# EAGLE board 555-Oscillator (EAGLE 7.2.0)
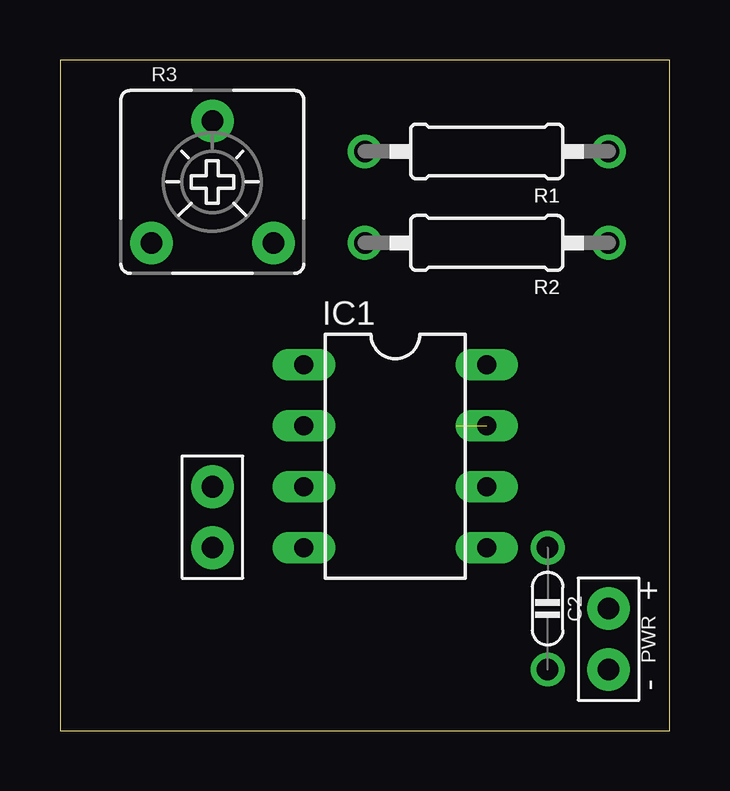
[diagram p0: board, top side]
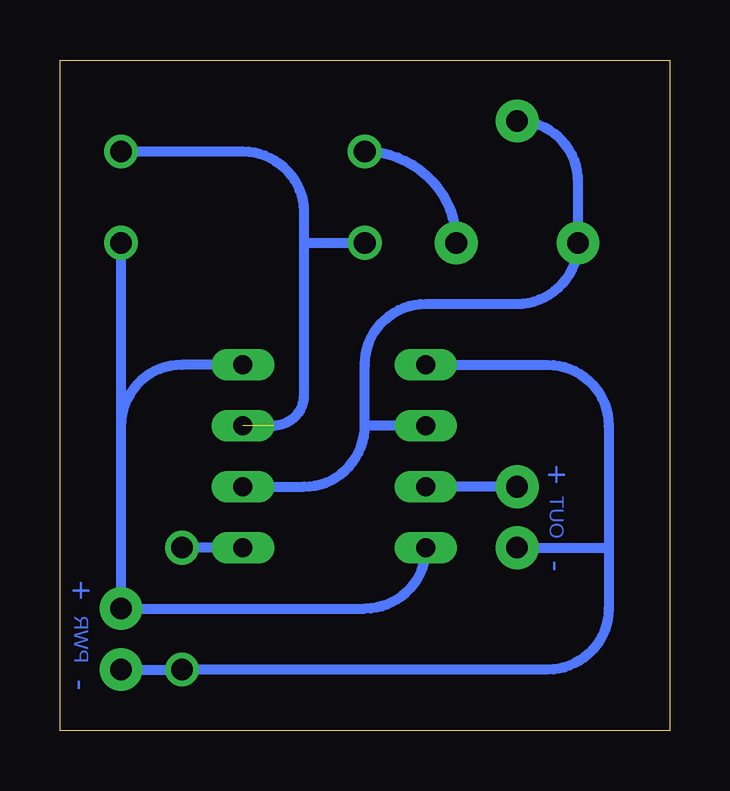
[diagram p1: board, bottom side, seen from below]

Size 25.4 x 27.94 mm. Coordinates in mm from the lower left corner, seen from the top.
Outline: 0,0 25.4,0 25.4,27.94 0,27.94 0,0
Copper layers (1*16): Top 0.035mm / dielectric 1.5mm / Bottom 0.035mm
Design rules "default": minimum track width 10mil, minimum drill 24mil, track to track 8mil, track to pad 8mil, pad to pad 8mil, via to via 8mil, smd to smd 8mil, copper to edge 40mil, drill to drill 8mil, minimum pad ring 10mil, minimum via ring 8mil, stop-mask expansion 4mil, vias tented up to drill 0mil, thermal gap 10mil

## Footprints (pad centres in the part's own frame; a part is rotated, then mirrored left to right if it is on the bottom)
C050-020X036/V = drill 0.9: 1 0,-2.54; 2 0,2.54
DIL08 = drill 0.8 pad 1.27 long: 1 -3.81,3.81; 2 -3.81,1.27; 3 -3.81,-1.27; 4 -3.81,-3.81; 5 3.81,-3.81; 6 3.81,-1.27; 7 3.81,1.27; 8 3.81,3.81
SPAD-+ = drill 0.9 pad 1.778: 1 0,1.27; 2 0,-1.27
0207/10 = drill 0.9: 1 -5.08,0; 2 5.08,0
POT-V = drill 0.9 pad 1.778: A -2.54,-2.54; E 2.54,-2.54; S 0,2.54
PWR-R = drill 0.9 pad 1.778: 1 0,-1.27; 2 0,1.27

## Placement (x,y rotation side)
C2  10n  [C050-020X036/V]  20.32,5.08 180 top
IC1  555  [DIL08]  13.97,11.43 0 top
OUT  SPAD+--+  [SPAD-+]  6.35,8.89 180 top
R1  1kΩ  [0207/10]  17.78,24.13 180 top
R2  10kΩ  [0207/10]  17.78,20.32 180 top
R3  220kΩ  [POT-V]  6.35,22.86 0 top
S1  VCC_GNDPWR-R  [PWR-R]  22.86,3.81 0 top

## Library data of the parts
C2 = c
IC1 = ic
OUT S1 = pad
R1-R3 = r

## Nets
GND: C2.2 IC1.1 OUT.1 S1.1
N$1: IC1.7 R1.1 R2.2
N$2: R1.2 R3.E
N$3: IC1.2 IC1.6 R3.A R3.S
N$6: C2.1 IC1.5
N$8: IC1.3 OUT.2
VCC: IC1.4 IC1.8 R2.1 S1.2

## Tracks (layer width: path | path; a pad name or v marks a point on that pad's centre or on a via)
GND
  Bottom 0.406: IC1.1 5.08,15.24 arc90 2.54,12.7 2.54,7.62 | OUT.1 2.54,7.62 | 2.54,7.62 2.54,5.08 arc90 5.08,2.54 C2.2 S1.1
N$1  (1 unrouted)
  Bottom 0.406: R1.1 17.78,24.13 arc90 15.24,21.59 15.24,20.32 | 15.24,20.32 15.24,13.97 arc90 16.51,12.7 | 15.24,20.32 R2.2
N$2
  Bottom 0.406: R1.2 arc90 R3.E
N$3
  Bottom 0.406: R3.S arc90 3.81,22.86 R3.A arc90 6.35,17.78 10.16,17.78 arc-90 12.7,15.24 12.7,12.7 | IC1.6 15.24,10.16 arc-90 12.7,12.7 | IC1.2 12.7,12.7
N$6
  Bottom 0.406: IC1.5 C2.1
N$8
  Bottom 0.406: OUT.2 IC1.3
VCC
  Bottom 0.406: IC1.4 arc90 12.7,5.08 S1.2 22.86,12.7 | 20.32,15.24 arc-90 22.86,12.7 | R2.1 22.86,12.7 | IC1.8 20.32,15.24 | 20.32,15.24 arc-90 22.86,12.7